# Altium PCB PCB1.PcbDoc
Units mm, origin at the board's own origin, x right, y up, seen from the top; angles counter-clockwise.
Board outline 62 x 62 mm, 2 copper layers (Top Layer, Bottom Layer); 44 components, 31 nets, 134 pads, 72 vias.
Unrouted connection lines stored in the file: 24.
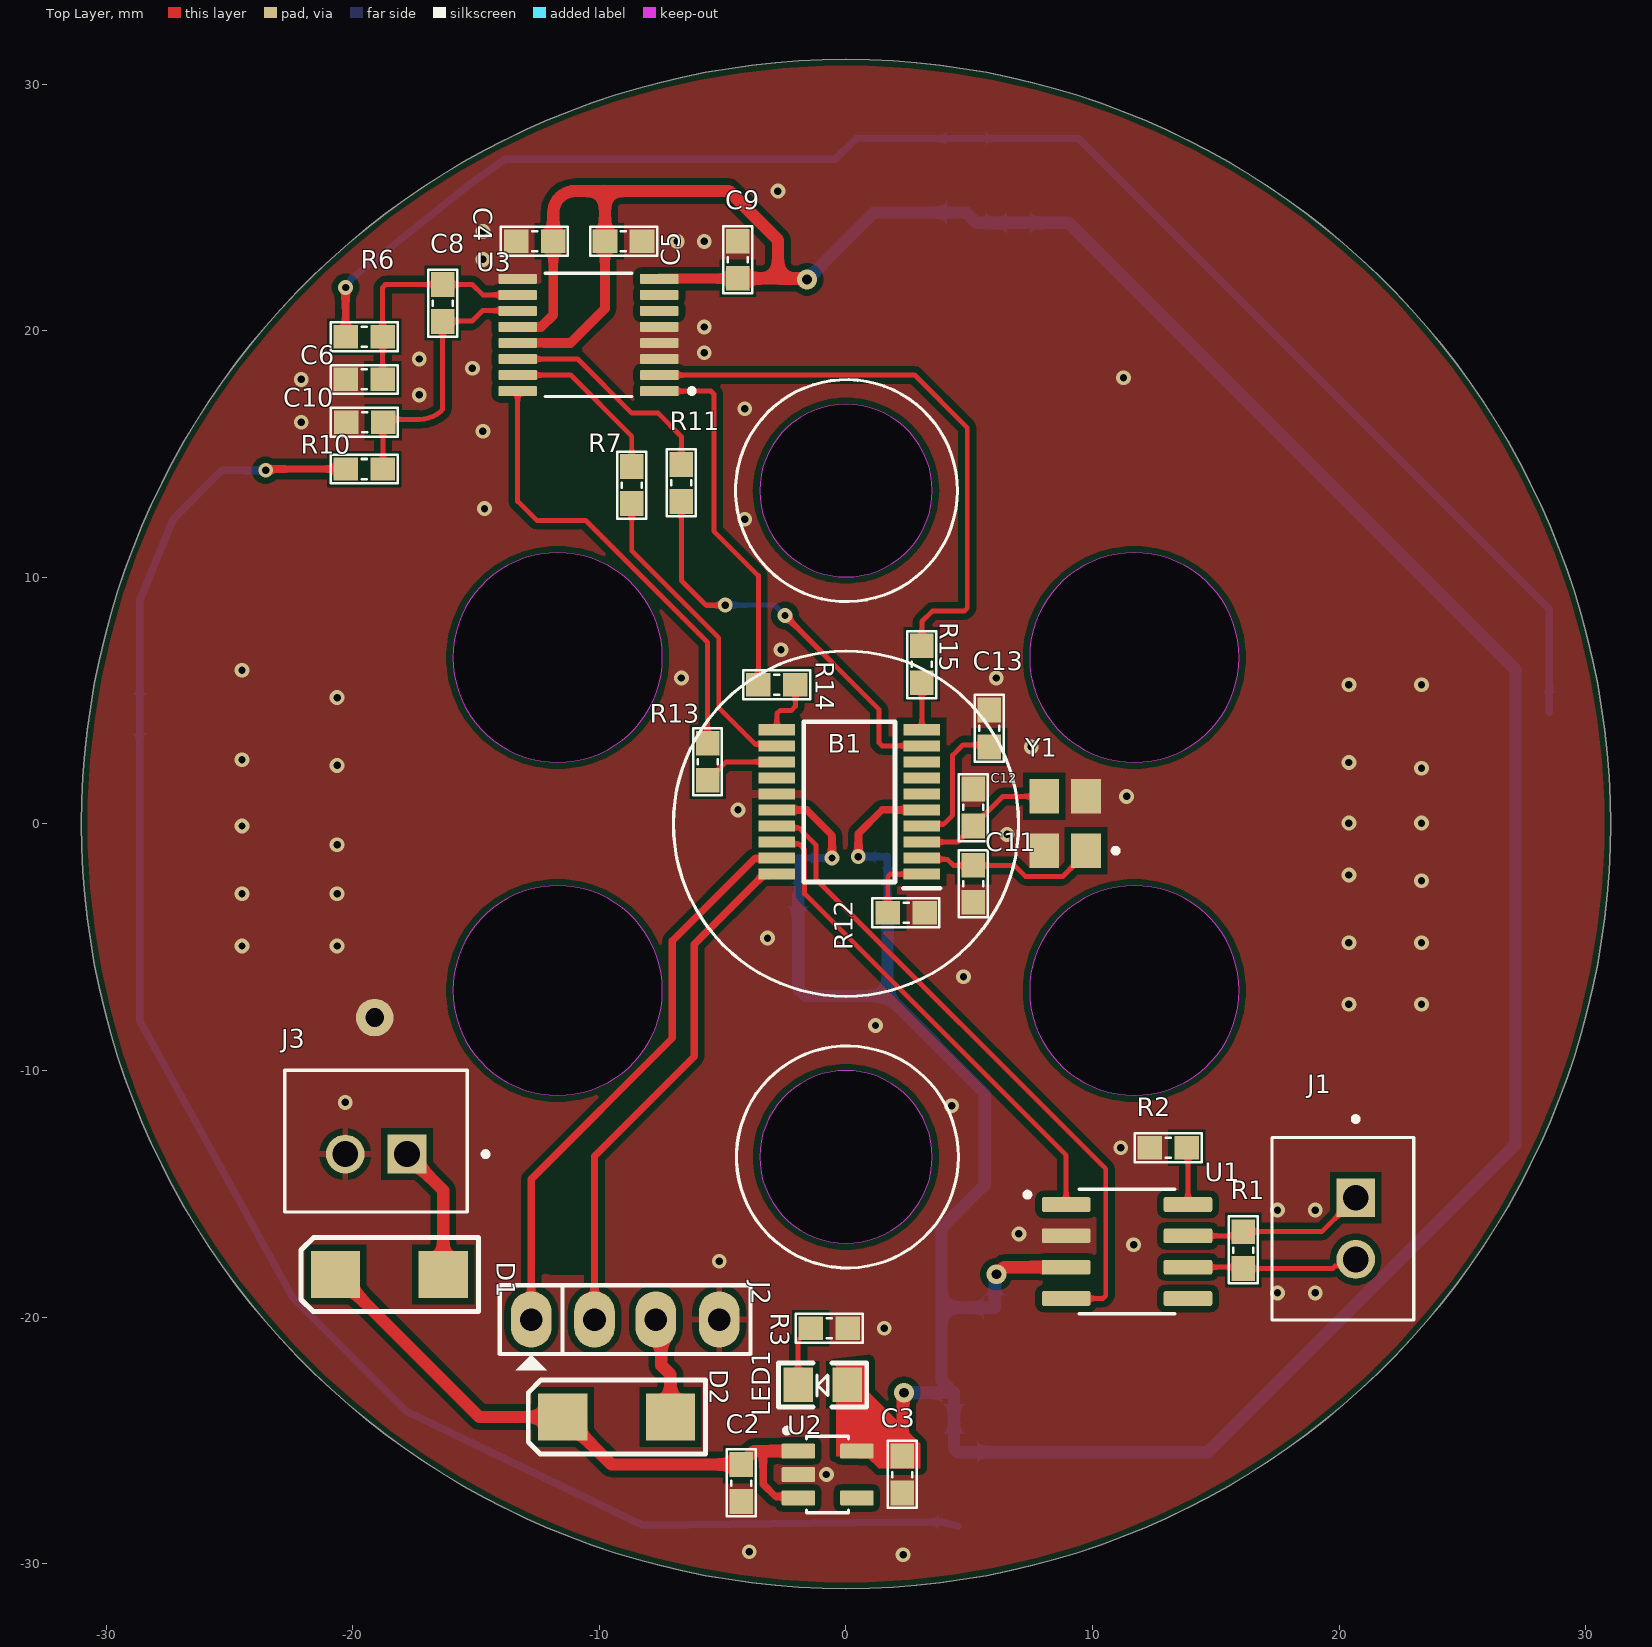
[diagram p0: Top Layer view]
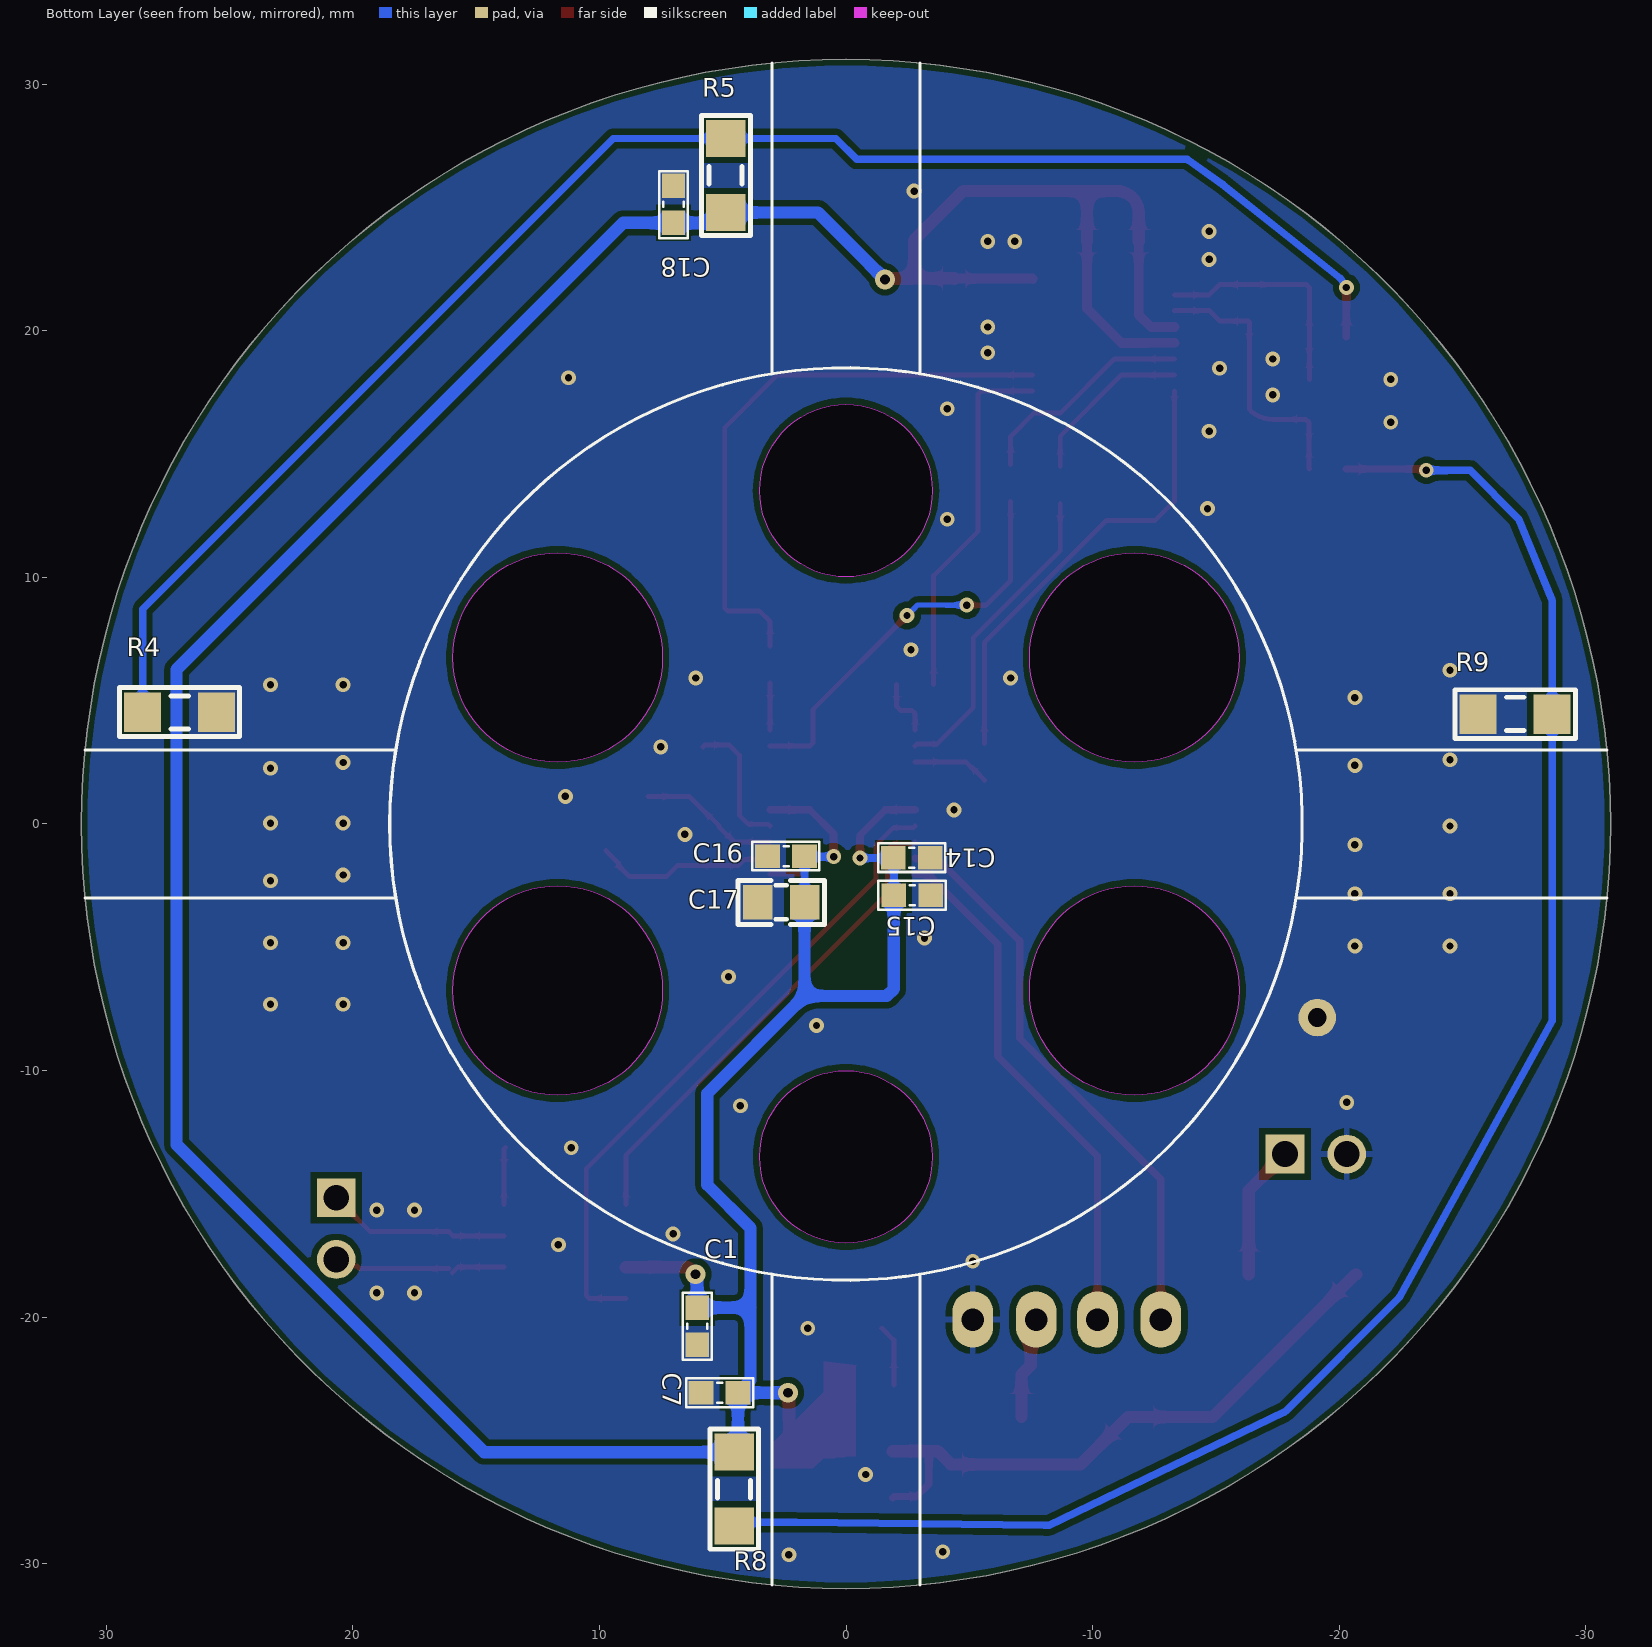
[diagram p1: Bottom Layer view, seen from below]
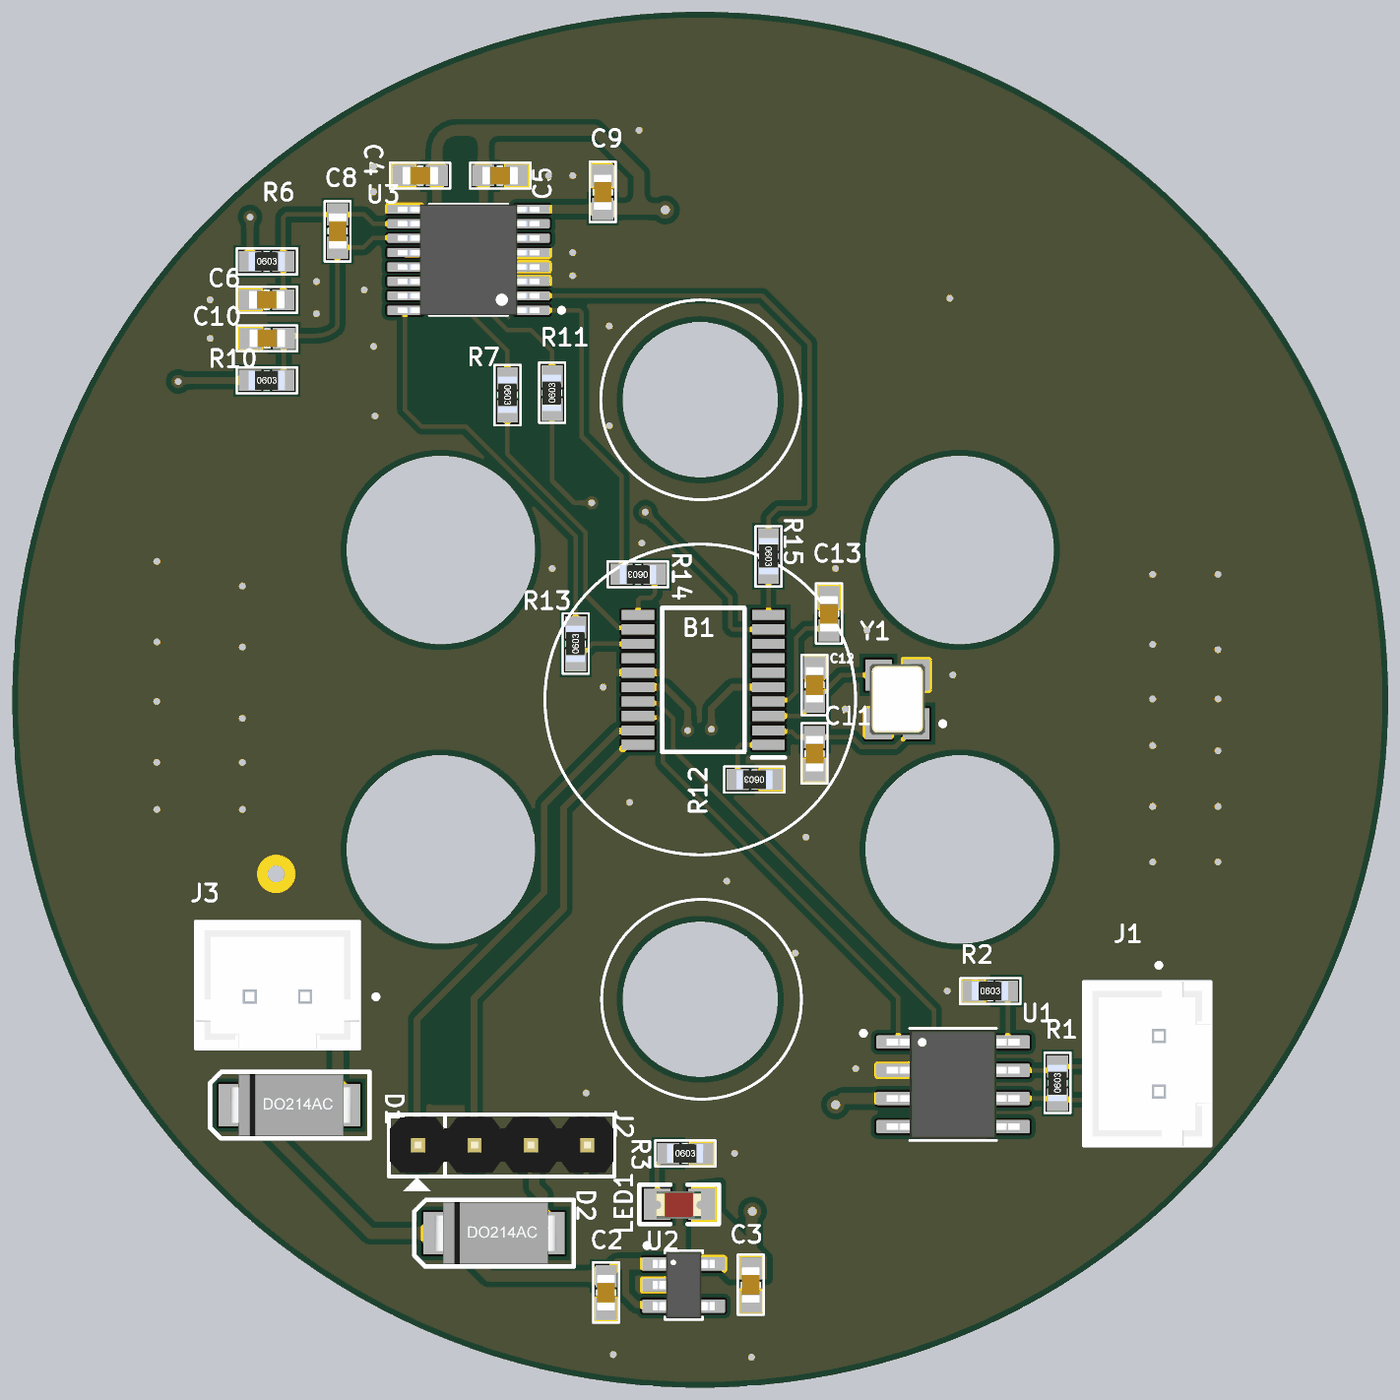
[diagram p2: 3D render of the assembled board from above, using the file's embedded part models]
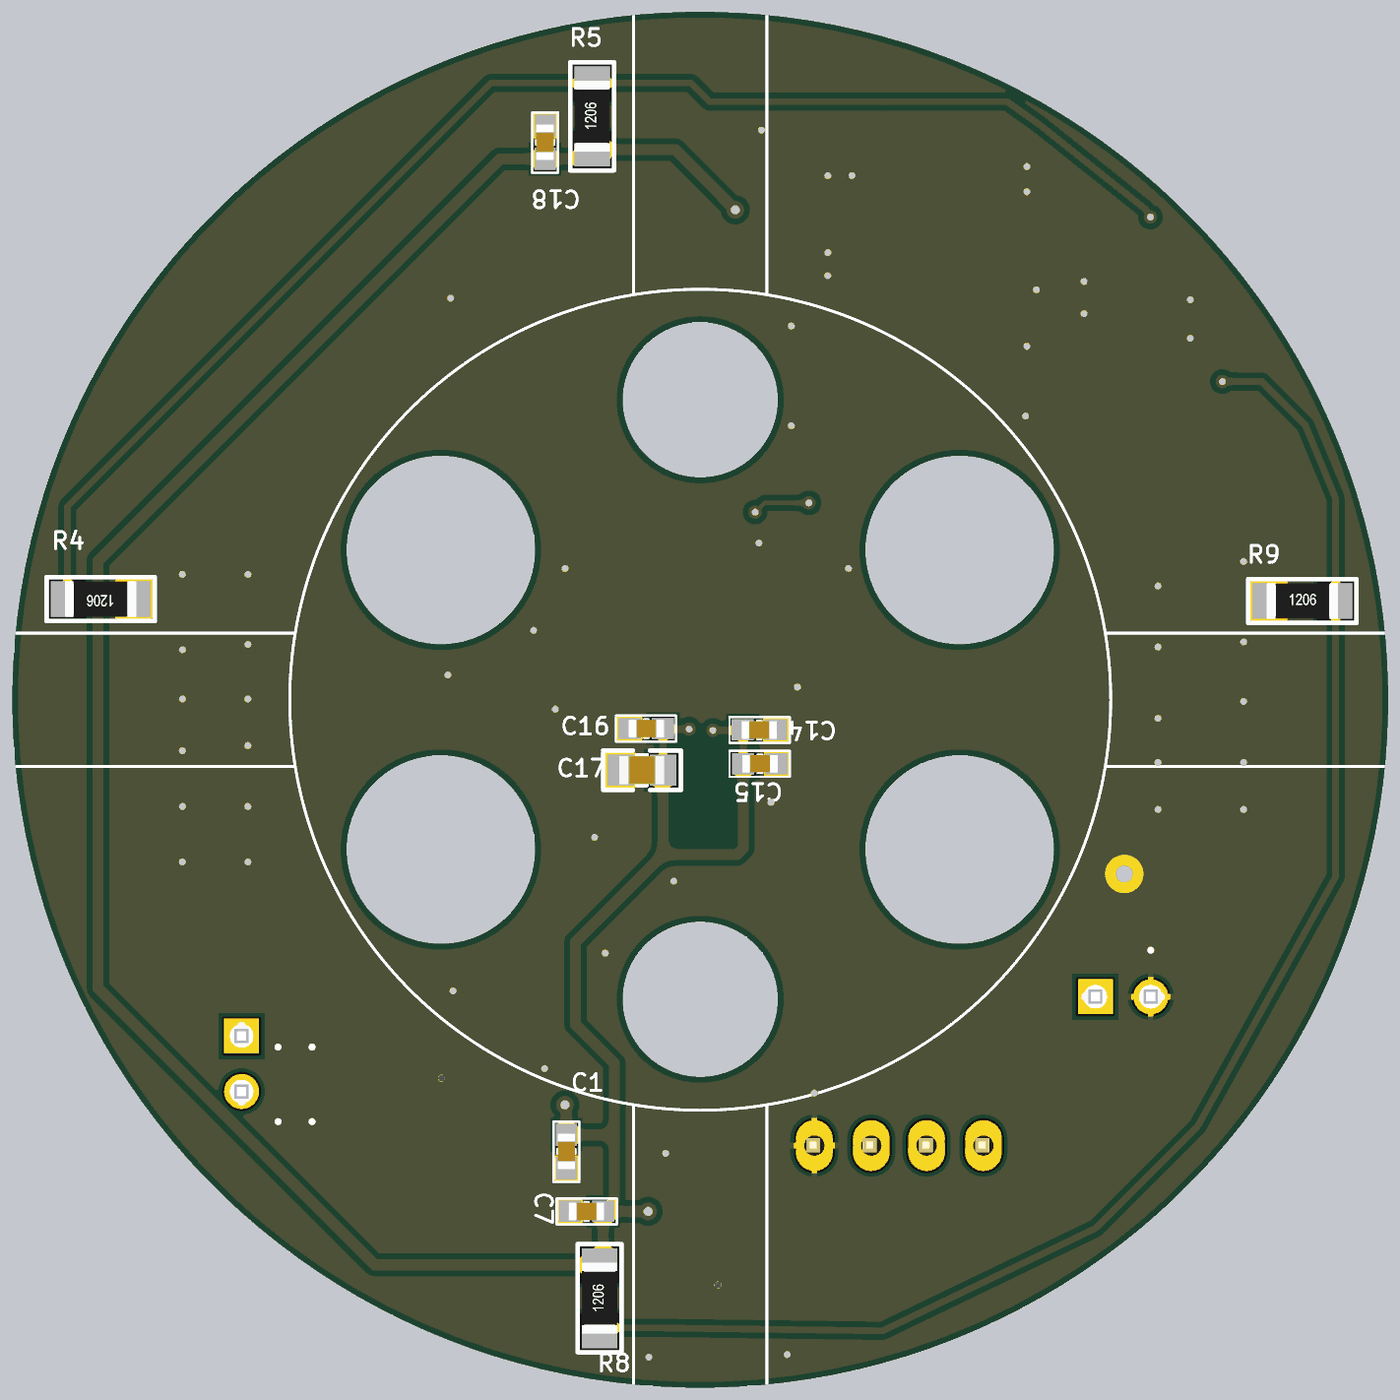
[diagram p3: 3D render of the assembled board from below, using the file's embedded part models]

## Layer stack, top to bottom
Top Solder: solder mask 0.0102, Solder Resist, Dk 3.5
Top Layer: signal copper 0.0356
Dielectric 1: dielectric 0.32, FR-4, Dk 4.8
Bottom Layer: signal copper 0.0356
Bottom Solder: solder mask 0.0102, Solder Resist, Dk 3.5

## Board outline
-31,0 ccw(c0,0) 0,-31 ccw(c0,0) 31,0 ccw(c0,0) 0,31 ccw(c0,0)
cut-out: -3.5,13.518 ccw(c0,13.518) 0,10.018 ccw(c0,13.518) 3.5,13.518 ccw(c0,13.518) 0,17.018 ccw(c0,13.518)
cut-out: 7.442,-6.75 ccw(c11.692,-6.75) 11.692,-11 ccw(c11.692,-6.75) 15.942,-6.75 ccw(c11.692,-6.75) 11.692,-2.5 ccw(c11.692,-6.75)
cut-out: 7.442,6.75 ccw(c11.692,6.75) 11.692,2.5 ccw(c11.692,6.75) 15.942,6.75 ccw(c11.692,6.75) 11.692,11 ccw(c11.692,6.75)
cut-out: -3.5,-13.5 ccw(c0,-13.5) 0,-17 ccw(c0,-13.5) 3.5,-13.5 ccw(c0,-13.5) 0,-10 ccw(c0,-13.5)
cut-out: -15.941,6.75 ccw(c-11.691,6.75) -11.691,2.5 ccw(c-11.691,6.75) -7.441,6.75 ccw(c-11.691,6.75) -11.691,11 ccw(c-11.691,6.75)
cut-out: -15.941,-6.75 ccw(c-11.691,-6.75) -11.691,-11 ccw(c-11.691,-6.75) -7.441,-6.75 ccw(c-11.691,-6.75) -11.691,-2.5 ccw(c-11.691,-6.75)

## Design rules (kind name [scope] priority, off if disabled: settings)
BoardOutlineClearance [All] p1: gap=0.254 ignorepadtopadclearanceinfootprint=FALSE except(0: Arc-SplitContinuation Track-SplitContinuation SMDPad-SplitContinuation THPad-SplitContinuation Via-SplitContinuation Fill-SplitContinuation Poly-SplitContinuation Region-SplitContinuation Text-SplitContinuation)
Clearance Clearance_1 [All] p1: gap=0.254 ignorepadtopadclearanceinfootprint=FALSE except(0: Text-Hole; 0.2: SMDPad-Hole THPad-Hole Via-Hole Fill-Hole Poly-Hole Region-Hole)
PlaneClearance [All] p1: clearance=1.27
PlaneConnect [All] p1: planeconnectstyle=Direct reliefexpansion=0.508 reliefentries=4 reliefconductorwidth=0.254 reliefairgap=0.254
PolygonConnect [All] p1: thpad.connectstyle=Direct thpad.reliefconductorwidth=0.254 thpad.reliefentries=4 thpad.polygonreliefangle="90 Angle" thpad.airgapwidth=0.254 smdpad.connectstyle=Direct smdpad.reliefconductorwidth=0.254 smdpad.reliefentries=4 smdpad.polygonreliefangle="90 Angle" smdpad.airgapwidth=0.254 via.connectstyle=Relief via.reliefconductorwidth=0.254 via.reliefentries=4 via.polygonreliefangle="90 Angle" via.airgapwidth=0.254
RoomDefinition Main [InComponentClass('Main')] p1: confinementstyle=ConfineIn formatcopy=TRUE lockcomponents=FALSE outline 75.88,-36.105 126.68,-36.105 126.68,-8.165 75.88,-8.165
RoutingVias [All] p1: holewidth=0.3 width=0.6 viastyle="Through Hole" minholewidth=0.3 minwidth=0.6 maxholewidth=0.3 maxwidth=0.6
SolderMaskExpansion [All] p1: expansion=0.102 istentingtop=FALSE
Width [All] p1: maxlimit=0.5 minlimit=0.2 preferedwidth=0.3 minimp=50.000000 maximp=50.000000 favimp=50.000000
28 further rules are at their usual default settings.

## Components (designator, comment, footprint, x,y, rotation, side; value= is the part's Value field where it differs from the comment)
B1 "STM32F042F4P6" SOP65P640X120-20N 0.137,0.895 r180 top
C1 "104" "tu 0603"#1 6.034,-20.36 r270 bottom
C2 "105" "tu 0603"#1 -4.245,-26.724 r90 top
C3 "105" "tu 0603"#2 2.277,-26.377 r90 top
C4 "104" "tu 0603"#1 -12.619,23.623 r180 top
C5 "104" "tu 0603"#1 -9.024,23.623 r0 top
C6 "103" "tu 0603"#1 -19.539,18.026 r0 top
C7 "104" "tu 0603"#1 5.128,-23.06 r180 bottom
C8 "104" "tu 0603"#1 -16.345,21.123 r270 top
C9 "104" "tu 0603"#1 -4.395,22.873 r90 top
C10 "103" "tu 0603"#1 -19.513,16.289 r180 top
C11 "15pF" "tu 0603"#1 5.154,-2.429 r90 top
C12 "15pF" "tu 0603"#1 5.154,0.67 r270 top
C13 "104" "tu 0603"#1 5.803,3.875 r90 top
C14 "103" "tu 0603"#1 -2.662,-1.362 r180 bottom
C15 "105" "tu 0603"#1 -2.689,-2.886 r0 bottom
C16 "104" "tu 0603"#1 2.43,-1.3 r0 bottom
C17 "4.7uF" "tu 0805" 2.626,-3.178 r0 bottom
C18 "104" "tu 0603"#1 6.995,25.125 r270 bottom
D1 "SS14" "DIODE SMD" -18.514,-18.164 r0 top
D2 "SS14" "DIODE SMD" -9.302,-23.943 r0 top
J1 "B2B-XH-A_(LF)(SN)" JST_B2B-XH-A_(LF)(SN) 20.143,-16.405 r90 top
J2 "2.54_4P" JP4 -10.223,-20.093 r0 top value="Jump Đơn Đực 2.54MM 1x40P Thẳng 11MM"
J3 "B2B-XH-A_(LF)(SN)" JST_B2B-XH-A_(LF)(SN) -19.055,-12.861 r0 top
LED1 "Đỏ" "led 0805" -0.937,-22.793 r180 top
R1 "120R" "tro smd 0603" 16.104,-17.277 r90 top
R2 "10k" "tro smd 0603" 13.061,-13.126 r0 top
R3 "1k" "tro smd 0603" -0.684,-20.447 r0 top
R4 "TMD" "tro smd 1206" 27.023,4.536 r0 bottom
R5 "TMD" "tro smd 1206" 4.871,26.297 r90 bottom
R6 "100R" "tro smd 0603" -19.539,19.757 r0 top
R7 "47R" "tro smd 0603" -8.686,13.744 r270 top
R8 "TMD" "tro smd 1206" 4.532,-26.97 r90 bottom
R9 "TMD" "tro smd 1206" -27.135,4.452 r180 bottom
R10 "100R" "tro smd 0603" -19.539,14.393 r0 top
R11 "47R" "tro smd 0603" -6.676,13.829 r90 top
R12 "10k" "tro smd 0603" 2.444,-3.595 r180 top
R13 "47R" "tro smd 0603" -5.612,2.52 r90 top
R14 "47R" "tro smd 0603" -2.801,5.65 r180 top
R15 "47R" "tro smd 0603" 3.075,6.471 r270 top
U1 "SN65HVD230D" SOIC127P599X175-8N 11.396,-17.334 r0 top
U2 "AP2112K-3.3TRG1" SOT95P285X140-5N -0.747,-26.377 r0 top
U3 "ADS1220IPW" SOP65P640X120-16N -10.442,19.829 r180 top
Y1 "X322516MLB4SI" OSC_X322516MLB4SI 8.883,0.017 r180 top

## Footprints (in the part's own frame and the unit in brackets; to place one, negate y for a bottom-side part, rotate by r counter-clockwise, add the part's x,y. Pads: shape width x height; smd on the part's side, far side on the other; paste and mask are expansions set on the pad)
"DIODE SMD" [mm]
  rect 2x1.9 smd: 1(2.184,-0.102) 2(-2.184,-0.102)
  silkscreen extent -3.58,-1.6 3.61,1.4, body extent -2.67,-1.5 2.82,1.3, height 2.3
JP4 [mil] "Jumper 4"
  oval 65x90 hole 36: 1(-100,0) 2(1,0) 3(99,0) 4(200,0)
  silkscreen extent -150,-81 250,55, body extent -148,-48 248,50, height 354
JST_B2B-XH-A_(LF)(SN) [mm]
  rect 1.575x1.575 hole 1.05: 1(1.25,-0.525)
  round 1.575 hole 1.05: 2(-1.25,-0.525)
  silkscreen extent -3.7,-2.88 4.54,2.88, body extent -3.7,-2.88 3.7,2.88, height 7
"led 0805" [mm]
  rect 1.2x1.4 smd: 1(-0.996,-0.051) 2(1.004,-0.051)
  silkscreen extent -1.78,-0.94 1.8,0.84, body extent -0.98,-0.65 1.04,0.6, height 1.1
OSC_X322516MLB4SI [mm]
  rect 1.2x1.4 smd: 1(-0.85,1.1) 2(-0.85,-1.1) 3(0.85,-1.1) 4(0.85,1.1)
  silkscreen extent -2.15,1 -1.95,1.2, body extent -1.25,-1.6 1.25,1.6, height 0.8
SOIC127P599X175-8N [mm]
  rrect25% 1.97x0.6 smd: 1(-2.47,1.905) 2(-2.47,0.635) 3(-2.47,-0.635) 4(-2.47,-1.905) 5(2.47,-1.905) 6(2.47,-0.635) 7(2.47,0.635) 8(2.47,1.905)
  silkscreen extent -4.14,-2.53 1.95,2.53, body extent -3,-2.45 3,2.45, height 1.75
SOP65P640X120-16N [mm]
  rrect25% 1.57x0.41 smd: 1(-2.87,2.275) 2(-2.87,1.625) 3(-2.87,0.975) 4(-2.87,0.325) 5(-2.87,-0.325) 6(-2.87,-0.975) 7(-2.87,-1.625) 8(-2.87,-2.275) 9(2.87,-2.275) 10(2.87,-1.625) 11(2.87,-0.975) 12(2.87,-0.325) 13(2.87,0.325) 14(2.87,0.975) 15(2.87,1.625) 16(2.87,2.275)
  silkscreen extent -4.29,-2.5 1.76,2.5, body extent -3.2,-2.5 3.2,2.5, height 1.2
SOP65P640X120-20N [mm]
  rect 1.475x0.45 smd: 1(-2.938,2.925) 2(-2.938,2.275) 3(-2.938,1.625) 4(-2.938,0.975) 5(-2.938,0.325) 6(-2.938,-0.325) 7(-2.938,-0.975) 8(-2.938,-1.625) 9(-2.938,-2.275) 10(-2.938,-2.925) 11(2.938,-2.925) 12(2.938,-2.275) 13(2.938,-1.625) 14(2.938,-0.975) 15(2.938,-0.325) 16(2.938,0.325) 17(2.938,0.975) 18(2.938,1.625) 19(2.938,2.275) 20(2.938,2.925)
  silkscreen extent -3.67,-3.25 1.85,3.5
SOT95P285X140-5N [mm]
  rrect15% 1.35x0.6 smd: 1(-1.185,0.95) 2(-1.185,0) 3(-1.185,-0.95) 4(1.185,-0.95) 5(1.185,0.95)
  silkscreen extent -1.75,-1.55 0.85,1.88, body extent -1.4,-1.5 1.4,1.5, height 1.4
"tro smd 0603" [mm] "Chip Capacitor, 2-Leads, Body 1,60x0,80mm, IPC Medium Density"
  rect 1x0.95 smd mask+0.076: 1(-0.75,0) 2(0.75,0)
  silkscreen extent -1.35,-0.58 1.37,0.58, body extent -0.82,-0.42 0.82,0.43, height 0.44
"tro smd 1206" [mm]
  rect 1.5x1.6 smd: 1(-1.5,0) 2(1.5,0)
  silkscreen extent -2.44,-0.99 2.44,0.99, body extent -1.6,-0.8 1.6,0.8, height 0.6
"tu 0603"#1 [mm] "Chip Capacitor, 2-Leads, Body 1,60x0,80mm, IPC Medium Density"
  rect 1x0.95 smd mask+0.076: 1(-0.75,0) 2(0.75,0)
  silkscreen extent -1.35,-0.58 1.37,0.58, body extent -0.8,-0.4 0.8,0.4, height 0.9
"tu 0603"#2 [mm] "Chip Capacitor, 2-Leads, Body 1,60x0,80mm, IPC Medium Density"
  rect 1x0.95 smd: 1(-0.75,0)
  rect 1x0.95 smd mask+0.076: 2(0.75,0)
  silkscreen extent -1.35,-0.58 1.37,0.58, body extent -0.8,-0.4 0.8,0.4, height 0.9
"tu 0805" [mm] "Compoment SMD 80x50mil"
  rect 1.2x1.4 smd: 1(-0.946,-0.003) 2(0.954,-0.003)
  silkscreen extent -1.75,-0.89 1.75,0.89, body extent -1.01,-0.64 1.01,0.63, height 0.61

## Part data
B1: "ARM-based 32-bit MCU, up to 32 KB Flash, crystal-less USB FS 2.0, CAN, 9 timers, ADC and comm. interfaces, 2.0 - 3.6 V", Manufacturer_Name=STMicroelectronics, Mouser Part Number=511-STM32F042F4P6, Arrow Part Number=STM32F042F4P6, Arrow Price/Stock=https://www.arrow.com/en/products/stm32f042f4p6/stmicroelectronics?utm_currency=USD&region=nac, Datasheet Link=https://www.st.com/resource/en/datasheet/stm32f042c4.pdf, Geometry.Height=1.2mm, Manufacturer_Part_Number=STM32F042F4P6, Mouser Price/Stock=https://www.mouser.co.uk/ProductDetail/STMicroelectronics/STM32F042F4P6?qs=4b8myOmUP%252BvvhAaQx2eFdg%3D%3D
C1 C4 C5 C7 C8 C9 C11 C12 C13 C16 C18: library part "Tu 0603 104 50V 10%", "Dán", Chung_Loai=Dán, Don_Vi=Con, Ma_Hang=MH004568, So_Chan=2, Ten_Linh_Kien="Tụ 0603 104-100nF 10% 50V"
C2 C3 C15: library part "Tu 0603 105 16V 20%", "Dán", Chung_Loai=Dán, Don_Vi=Con, Ma_Hang=MH004574, So_Chan=2, Ten_Linh_Kien="Tụ 0603 105-1uF 20% 16V"
C6 C10 C14: library part "Tu 0603 103 50V 10%", "Dán", Chung_Loai=Dán, Don_Vi=Con, Ma_Hang=MH004567, So_Chan=2, Ten_Linh_Kien="Tụ 0603 103-10nF 10% 50V"
C17: library part "Tu 0805 475 25V 20%", "Dán", Chung_Loai=Dán, Don_Vi=Con, Ma_Hang=MH004276, So_Chan=2, Ten_Linh_Kien="Tụ 0805 475-4.7uF 20% 25V"
D1 D2: library part "Diode SS14 ( 1N5819)", "Dán", Chung_Loai=Dán, Don_Vi=Con, Ma_Hang=MH002211, Ten_Linh_Kien="Diode SS14 DO214 Schottky 1A 40V ( 1N5819 DO214)"
J1 J3: "Connector Header Through Hole 2 position 0.098 (2.50mm)", Package=None, Check_prices=https://www.snapeda.com/parts/B2B-XH-A%20(LF)(SN)/JST+Sales+America+Inc./view-part/?ref=eda, MF="JST Sales", MP="B2B-XH-A (LF)(SN)", SnapEDA_Link=https://www.snapeda.com/parts/B2B-XH-A%20(LF)(SN)/JST+Sales+America+Inc./view-part/?ref=snap
J2: library part "Jum Don Duc 2.54_4P", "Cắm st link cho stm32", Chung_Loai=Cắm, Don_Vi=Con, Ma_Hang=MH000903
LED1: library part "LED 0805", "Dán", Chung_Loai=Cắm, Don_Vi=Con
R1 R6 R10: library part "Tro 0603 5% 100R", "Dán", Chung_Loai=Dán, Don_Vi=Con, Ma_Hang=MH006315, So_Chan=2, Ten_Linh_Kien="Trở 0603 5% 100R"
R2 R12: library part "Tro 0603 1% 10k", "Dán", Chung_Loai=Dán, Don_Vi=Con, Ma_Hang=MH006333, So_Chan=2, Ten_Linh_Kien="Trở 0603 1% 10k"
R3: library part "Tro 0603 1% 1k", "Dán", Chung_Loai=Dán, Don_Vi=Con, Ma_Hang=MH006334, So_Chan=2, Ten_Linh_Kien="Trở 0603 1% 1k"
R4 R5 R8 R9: library part "Tro 1206 1% 1k", "Dán", Chung_Loai=Dán, Don_Vi=Con, Ma_Hang=MH005880, So_Chan=2, Ten_Linh_Kien="Trở 1206 1% 1k"
R7 R11 R13 R14 R15: library part "Tro 0603 1% 56R", "Dán", Chung_Loai=Dán, Don_Vi=Con, Ma_Hang=MH006338, So_Chan=2, Ten_Linh_Kien="Trở 0603 1% 56R"
U1: "3.3 V CAN Transceiver with Standby Mode", Package="SOIC-8 Texas Instruments", Check_prices=https://www.snapeda.com/parts/SN65HVD230D/Texas+Instruments/view-part/?ref=eda, MF="Texas Instruments", MP=SN65HVD230D, SnapEDA_Link=https://www.snapeda.com/parts/SN65HVD230D/Texas+Instruments/view-part/?ref=snap
U2: "Linear Voltage Regulator IC Positive Fixed 1 Output 600mA SOT-25", Package="SOT-753 Diodes Inc.", Availability="In Stock", Check_prices=https://www.snapeda.com/parts/AP2112K-3.3TRG1/Diodes+Inc./view-part/?ref=eda, MF="Diodes Inc.", MP=AP2112K-3.3TRG1, Price=None, Purchase-URL=https://pricing.snapeda.com/search/part/AP2112K-3.3TRG1/?ref=eda, SnapEDA_Link=https://www.snapeda.com/parts/AP2112K-3.3TRG1/Diodes+Inc./view-part/?ref=snap
U3: "24-bit, 2-kSPS, four-channel, low-power, delta-sigma ADC with PGA, VREF, SPI and two IDACs", Package="TSSOP-16 Texas Instruments", Check_prices=https://www.snapeda.com/parts/ADS1220IPW/Texas+Instruments/view-part/?ref=eda, MF="Texas Instruments", MP=ADS1220IPW, SnapEDA_Link=https://www.snapeda.com/parts/ADS1220IPW/Texas+Instruments/view-part/?ref=snap
Y1: "External dimensions: 3.2 x 2.5 x 0.8 mm.Frequency range: 11.0592MHz ~54MHz", Package=Package, Check_prices=https://www.snapeda.com/parts/X322516MLB4SI/YXC/view-part/?ref=eda, MF=YXC, MP=X322516MLB4SI, SnapEDA_Link=https://www.snapeda.com/parts/X322516MLB4SI/YXC/view-part/?ref=snap

## Free pads (board coordinates)
  round 1.524 hole 0.762 paste+0 mask+0.102: 6(-19.111,-7.85)

## Via types
v1: diameter 0.6, hole 0.3, Top Layer to Bottom Layer, tented both sides, 69 vias
v2: diameter 0.8, hole 0.4, Top Layer to Bottom Layer, tented both sides, 3 vias

## Nets (pads, with @x,y where several pads share a name; then routed paths per layer and width w, separated by ;. In a path a pad name is that pad's centre, name@x,y a point inside that pad or via, vN(x,y) a via of type N, cw(c..) or ccw(c..) an arc to the next point about the centre after c; other vN are vias at no path point)
+3.3: B1.5 B1.16 C1.1 C3.2 C4.1 C5.1 C7.2 C9.1 C14.1 C15.2 C16.1 C17.1 C18.2 LED1.1 R5.1 R8.2 U1.3 U2.5 U3.8 U3.12 U3.13 | length 179.2
  Top Layer w0.2: C3.2 C3.2@2.277,-25.477
  Top Layer w0.3: B1.16 -1.593,0.57 -0.569,-0.454 v1(-0.569,-1.38) ; v1(0.5,-1.324) 0.5,-0.391 1.461,0.57 B1.5
  Top Layer w0.4: U3.13@-13.312,19.513 -12.244,19.513 -12.235,19.504 -11.167,19.504 -9.774,20.896 C5.1 ; U3.12@-13.312,20.145 -12.369,20.145 -11.869,20.645 C4.1 ; U3.8 -7.563,22.114 C9.1@-4.41,22.114
  Top Layer w0.5: C4.1 -11.869,24.78 cw(c-10.985,24.78) -10.985,25.664 -9.774,25.664 ; C5.1 -9.774,25.664 ; C9.1@-4.41,22.114 -4.395,22.098 C9.1 -2.76,22.123 ; v2(-1.579,22.08) -1.623,22.123 -2.76,22.123 ; LED1.1 0.059,-25.377 0.109,-25.427 U2.5 0.47,-25.427 0.52,-25.477 2.277,-25.477 2.314,-25.44 2.314,-23.097 v2(2.351,-23.06) ; v2(6.1,-18.256) 6.127,-18.256 6.414,-17.969 U1.3 ; -9.774,25.664 -4.748,25.664 -2.76,23.676 -2.76,22.123
  Bottom Layer w0.3: C15.2 -1.939,-1.362 C14.1 -1.894,-1.38 v1(-0.569,-1.38) ; v1(0.5,-1.324) 1.656,-1.324 C16.1 C17.1
  Bottom Layer w0.5: C15.2 -1.939,-6.684 -1.646,-6.977 1.68,-6.977 ; v2(-1.579,22.08) 1.138,24.797 R5.1 5.293,24.375 C18.2 9.036,24.375 27.147,6.263 27.147,-13.003 14.68,-25.47 R8.2 4.378,-25.315 C7.2 C7.2@4.353,-23.06 ; C17.1 1.68,-6.977 ; v2(2.351,-23.06) 4.352,-23.06 4.128,-22.835 4.128,-22.81 3.874,-22.556 3.874,-19.61 ; v2(6.1,-18.256) 6.1,-18.283 6.034,-18.349 C1.1 3.874,-19.61 ; 1.68,-6.977 5.628,-10.925 5.628,-14.628 3.874,-16.382 3.874,-19.61
+5: D1.1 J3.1 | length 5.5
  Top Layer w0.5: J3.1 -16.33,-14.861 D1.1
+VBUS: D2.1 J2.3 | length 4.2
  Top Layer w0.5: J2.3 -7.488,-20.313 -7.488,-21.958 -7.117,-22.329 D2.1
GND: B1.15 C1.2 C2.1 C3.1 C4.2 C5.2 C6.1 C7.1 C9.2 C10.2 C11.1 C12.1 C13.2 C14.2 C15.1 C16.2 C17.2 C18.1 J2.4 J3.2 pad.6 R2.1 R3.2 R4.1 R9.1 R12.1 U1.2 U2.2 U3.3 U3.4 U3.5 U3.9 Y1.2 Y1.4
  other v1: 2.314,-29.631 -3.92,-29.511 -0.795,-26.377 1.552,-20.447 17.495,-19.014 19.03,-19.014 -5.143,-17.729 11.66,-17.06 7.011,-16.622 17.495,-15.654 19.03,-15.654 11.137,-13.126 4.282,-11.422 -20.305,-11.287 1.195,-8.172 20.391,-7.312 23.336,-7.312 4.764,-6.195 -24.49,-4.946 -20.632,-4.946 20.391,-4.813 23.336,-4.813 -3.181,-4.625 -24.49,-2.826 -20.632,-2.826 23.336,-2.3 20.391,-2.066 -20.632,-0.839 6.532,-0.423 -24.49,-0.079 20.391,0.038 23.336,0.038 -4.378,0.57 11.379,1.117 23.336,2.258 -20.632,2.375 20.391,2.492 -24.49,2.609 7.514,3.125 -20.632,5.123 20.391,5.65 23.336,5.65 -6.676,5.919 6.097,5.919 -24.49,6.232 -2.637,7.062 -4.103,12.353 -14.657,12.789 -14.723,15.928 -22.089,16.289 -4.103,16.84 -17.3,17.4 -22.089,18.026 11.251,18.092 -15.148,18.477 -17.3,18.854 -5.748,19.109 -5.748,20.154 -14.723,22.894 -6.839,23.623 -5.748,23.623 -14.723,24.027 -2.76,25.664
NetB1_1: B1.1 R12.2 | length 2.9
  Top Layer w0.2: R12.2 1.694,-2.147 1.811,-2.03 B1.1
NetB1_2: B1.2 C11.2 Y1.1 | length 7.5
  Top Layer w0.2: B1.2 3.127,-1.432 4.112,-1.432 4.36,-1.679 C11.2 6.83,-1.679 7.287,-2.137 8.78,-2.137 9.233,-1.683 9.233,-1.583 Y1.1
NetB1_3: B1.3 C12.2 Y1.3 | length 5.8
  Top Layer w0.2: B1.3 4.529,-0.73 5.154,-0.105 C12.2 5.154,-0.055 5.529,0.32 5.554,0.32 6.352,1.117 Y1.3
NetB1_4: B1.4 C13.1 | length 5.6
  Top Layer w0.2: B1.4 3.146,-0.009 3.959,-0.009 4.325,0.357 4.325,2.791 4.742,3.208 5.72,3.208 C13.1
NetB1_9: B1.9 R11.1 | length 16.5
  Top Layer w0.2: R11.1 -6.676,9.873 -5.677,8.875 v1(-4.898,8.875) ; v1(-2.475,8.455) 1.344,4.636 1.344,3.287 1.461,3.17 B1.9
  Bottom Layer w0.2: v1(-4.898,8.875) -2.903,8.875 -2.484,8.455 v1(-2.475,8.455)
NetB1_10: B1.10 R15.2 | length 1.9
  Top Layer w0.2: B1.10 R15.2
NetB1_11: B1.11 R14.1 | length 2.4
  Top Layer w0.2: B1.11 -2.801,4.481 -2.684,4.598 -2.225,4.598 -2.051,4.772 R14.1
NetB1_12: B1.12 R7.2 | length 12.7
  Top Layer w0.2: R7.2 -8.686,11.072 -5.158,7.545 -5.158,4.714 -3.685,3.241 -2.872,3.241 B1.12
NetB1_13: B1.13 R13.1 | length 3.1
  Top Layer w0.2: R13.1 -5.612,1.795 -5.237,2.17 -5.212,2.17 -4.862,2.52 B1.13
NetB1_17: B1.17 U1.4 | length 26.7
  Top Layer w0.2: B1.17 -2.73,-0.151 -1.917,-0.151 -1.223,-0.845 -1.223,-2.229 10.532,-13.985 10.532,-19.122 10.415,-19.239 U1.4
NetB1_18: B1.18 U1.1 | length 20
  Top Layer w0.2: B1.18 -2.73,-0.801 -1.917,-0.801 -1.677,-1.041 -1.677,-2.833 8.926,-13.437 U1.1
NetB1_19: B1.19 J2.1 | length 23.4
  Top Layer w0.3: J2.1 -12.763,-14.404 -7.037,-8.678 -7.037,-4.732 -3.706,-1.401 -2.822,-1.401 B1.19
NetB1_20: B1.20 J2.2 | length 21.4
  Top Layer w0.3: J2.2 -10.197,-13.466 -6.16,-9.428 -6.16,-4.876 -3.314,-2.03 B1.20
NetC2_2: C2.2 D1.2 D2.2 U2.1 U2.3 | length 25.3
  Top Layer w0.3: -3.358,-25.427 -3.358,-26.77 -2.859,-27.269 -1.959,-27.269 U2.3@-1.9,-27.327
  Top Layer w0.5: D1.2 -20.648,-18.265 -14.869,-24.045 D2.2 -11.436,-24.045 -9.507,-25.974 C2.2 -4.245,-25.949 -3.724,-25.427 -3.358,-25.427 U2.1@-1.9,-25.427
NetC6_2: C6.2 C8.1 R6.2 U3.10 | length 9.4
  Top Layer w0.2: C6.2 R6.2 -18.789,21.755 -18.672,21.873 C8.1 -15.148,21.873 -14.729,21.454 U3.10
NetC8_2: C8.2 C10.1 R10.2 U3.11 | length 11.3
  Top Layer w0.2: R10.2 -18.774,14.408 -18.774,16.279 -18.646,16.406 -17.296,16.406 ccw(c-17.294,17.734) -16.423,16.732 ccw(c-16.555,16.882) -16.355,16.882 -16.355,20.362 -16.33,20.388 -15.164,20.388 -14.733,20.819 -13.328,20.819 U3.11
NetJ1_1: J1.1 R1.2 U1.7 | length 7.4
  Top Layer w0.2: U1.7 15.932,-16.699 R1.2 19.297,-16.527 J1.1
NetJ1_2: J1.2 R1.1 U1.6 | length 6.9
  Top Layer w0.2: U1.6 15.736,-17.969 R1.1@15.966,-18.199 ; R1.1 19.724,-18.027 19.833,-17.918 20.405,-17.918 J1.2
NetLED1_2: LED1.2 R3.1 | length 2.5
  Top Layer w0.2: LED1.2 -1.941,-20.929 -1.459,-20.447 R3.1
NetR2_2: R2.2 U1.8 | length 2.3
  Top Layer w0.2: R2.2 13.866,-13.182 U1.8
NetR4_2: R4.2 R5.2 R6.1 | length 65.1
  Top Layer w0.3: R6.1 v1(-20.289,21.755)
  Bottom Layer w0.3: v1(-20.289,21.755) -20.09,22.068 -20.072,22.095 -20.037,22.131 -15.268,25.934 -15.261,25.939 -13.88,26.919 -13.847,26.953 -0.429,26.953 0.415,27.797 R5.2 9.438,27.797 28.523,8.712 R4.2
NetR7_1: R7.1 U3.15 | length 6.9
  Top Layer w0.2: U3.15 -11.167,18.204 -8.686,15.723 R7.1
NetR8_1: R8.1 R9.2 R10.1 | length 71.2
  Top Layer w0.3: v1(-23.531,14.34) -23.478,14.393 R10.1
  Bottom Layer w0.3: v1(-23.531,14.34) -25.309,14.34 -27.265,12.384 -28.612,9.133 -28.635,9.015 R9.2 -28.635,-7.975 -22.451,-19.166 -22.4,-19.233 -17.846,-23.787 -17.764,-23.845 -8.222,-28.44 -8.03,-28.44 2.022,-28.309 3.882,-28.309 R8.1
NetR11_2: R11.2 U3.14 | length 9.1
  Top Layer w0.2: U3.14 -10.883,18.854 -8.686,16.656 -7.619,16.656 -6.676,15.713 R11.2
NetR13_2: R13.2 U3.16 | length 18.6
  Top Layer w0.2: U3.16 -13.312,13.082 -12.539,12.309 -10.564,12.309 -5.612,7.357 R13.2
NetR14_2: R14.2 U3.1 | length 14.8
  Top Layer w0.2: U3.1 -5.474,17.554 -5.357,17.437 -5.357,11.875 -3.551,10.069 R14.2
NetR15_1: R15.1 U3.2 | length 23.7
  Top Layer w0.2: U3.2 2.784,18.204 4.917,16.071 4.917,8.751 4.8,8.634 3.5,8.634 3.075,8.208 R15.1
pads on no net: B1.6 B1.7 B1.8 B1.14 U1.5 U2.4 U3.6 U3.7

## Polygon pours and split planes (outlines as drawn)
GND on Bottom Layer "GND_L02_P000" (solid, remove dead copper, pour order 0): -40.107,31.605 29.937,31.605 cw(c29.937,29.065) 31.733,30.861 39.749,22.845 33.024,16.12 ccw(c34.82,14.323) 32.28,14.323 32.28,-31.376 -28.266,-31.376 ccw(c-28.266,-33.916) -30.062,-32.12 -30.424,-32.483 -39.732,-23.175 cw(c-37.936,-21.379) -40.476,-21.379 -40.476,31.789
GND on Top Layer "GND_L01_P001" (solid, remove dead copper, pour order 1): -35.611,35.234 32.774,35.234 cw(c32.774,32.694) 34.57,34.49 40.211,28.849 34.215,22.853 ccw(c36.011,21.057) 33.471,21.057 33.471,-31.011 -31.633,-31.011 cw(c-31.633,-28.471) -33.429,-30.267 -35.168,-28.528 cw(c-33.669,-27.029) -35.789,-27.029 -35.789,34.968

## Other copper
Top Layer:
  pour cut-out: -10.322,-12.417 -7.037,-9.116 -6.746,-9.558 -9.834,-12.647 ccw(c-8.038,-14.443) -10.578,-14.443 -10.578,-18.27 -11.918,-18.27 cw(c-11.918,-17.474) -12.481,-18.037 ccw(c-12.795,-17.723) -12.351,-17.723 -12.351,-17.715 cw(c-12.795,-17.715) -12.481,-18.029 ccw(c-12.795,-17.715) -12.351,-17.715 -12.351,-14.574
  pour cut-out: -15.941,6.75 ccw(c-11.691,6.75) -11.691,2.5 ccw(c-11.691,6.75) -7.441,6.75 ccw(c-11.691,6.75) -11.691,11 ccw(c-11.691,6.75)
  pour cut-out: 8.107,-18.735 8.088,-18.483 9.933,-18.486 9.869,-18.759 8.11,-18.723
  region net +3.3: -0.457,-21.944 -0.405,-21.996 -0.405,-25.627 0.826,-25.627 1.349,-26.15 1.382,-26.118 3.006,-26.118 3.006,-25.127 0.906,-23.028 0.906,-21.782

## Silkscreen, mask and mechanical layers (free items; w line width, h text height)
Top Overlay:
  circle w0.127: c0.001,0.012 r7
  circle w0.127: c0.058,-13.5 r4.5
  circle w0.127: c0.019,13.518 r4.5
Bottom Overlay:
  circle w0.127: c0,0 r18.5
  lines w0.127: -30.854,-3 -18.255,-3 ; -30.854,3 -18.255,3 ; -3,-30.855 -3,-18.255 ; -3,18.255 -3,30.854 ; 3,-30.855 3,-18.255 ; 3,18.255 3,30.854 ; 18.255,-3 30.855,-3 ; 18.255,3 30.855,3
Mechanical 1:
  circle w0.013: c0,0 r31
  circle w0.013: c0,13.518 r3.5
  circle w0.006: c0.058,0 r0.003
  circle w0.006: c-0.258,-0.259 r0.003
  circle w0.013: c11.692,-6.75 r4.25
  circle w0.006: c0,0 r0.003
  circle w0.006: c0,0 r0.003
  circle w0.006: c0,0 r0.003
  circle w0.006: c0,0 r0.003
  circle w0.006: c0,0 r0.003
  circle w0.006: c0,0 r0.003
  circle w0.006: c0,0 r0.003
  circle w0.006: c0,0 r0.003
  circle w0.006: c0,0 r0.003
  circle w0.006: c0,0 r0.003
  circle w0.013: c0,-13.5 r3.5
  circle w0.013: c-11.691,6.75 r4.25
  circle w0.013: c-11.691,-6.75 r4.25
  circle w0.013: c11.692,6.75 r4.25
  circle w0.006: c-58.967,-23.589 r0.003